# Altium PCB PCB3.PcbDoc
Units mm, origin at the board's own origin, x right, y up, seen from the top; angles counter-clockwise.
Board outline 65.4 x 65.4 mm, 2 copper layers (Top Layer, Bottom Layer); 56 components, 40 nets, 206 pads, 128 vias.
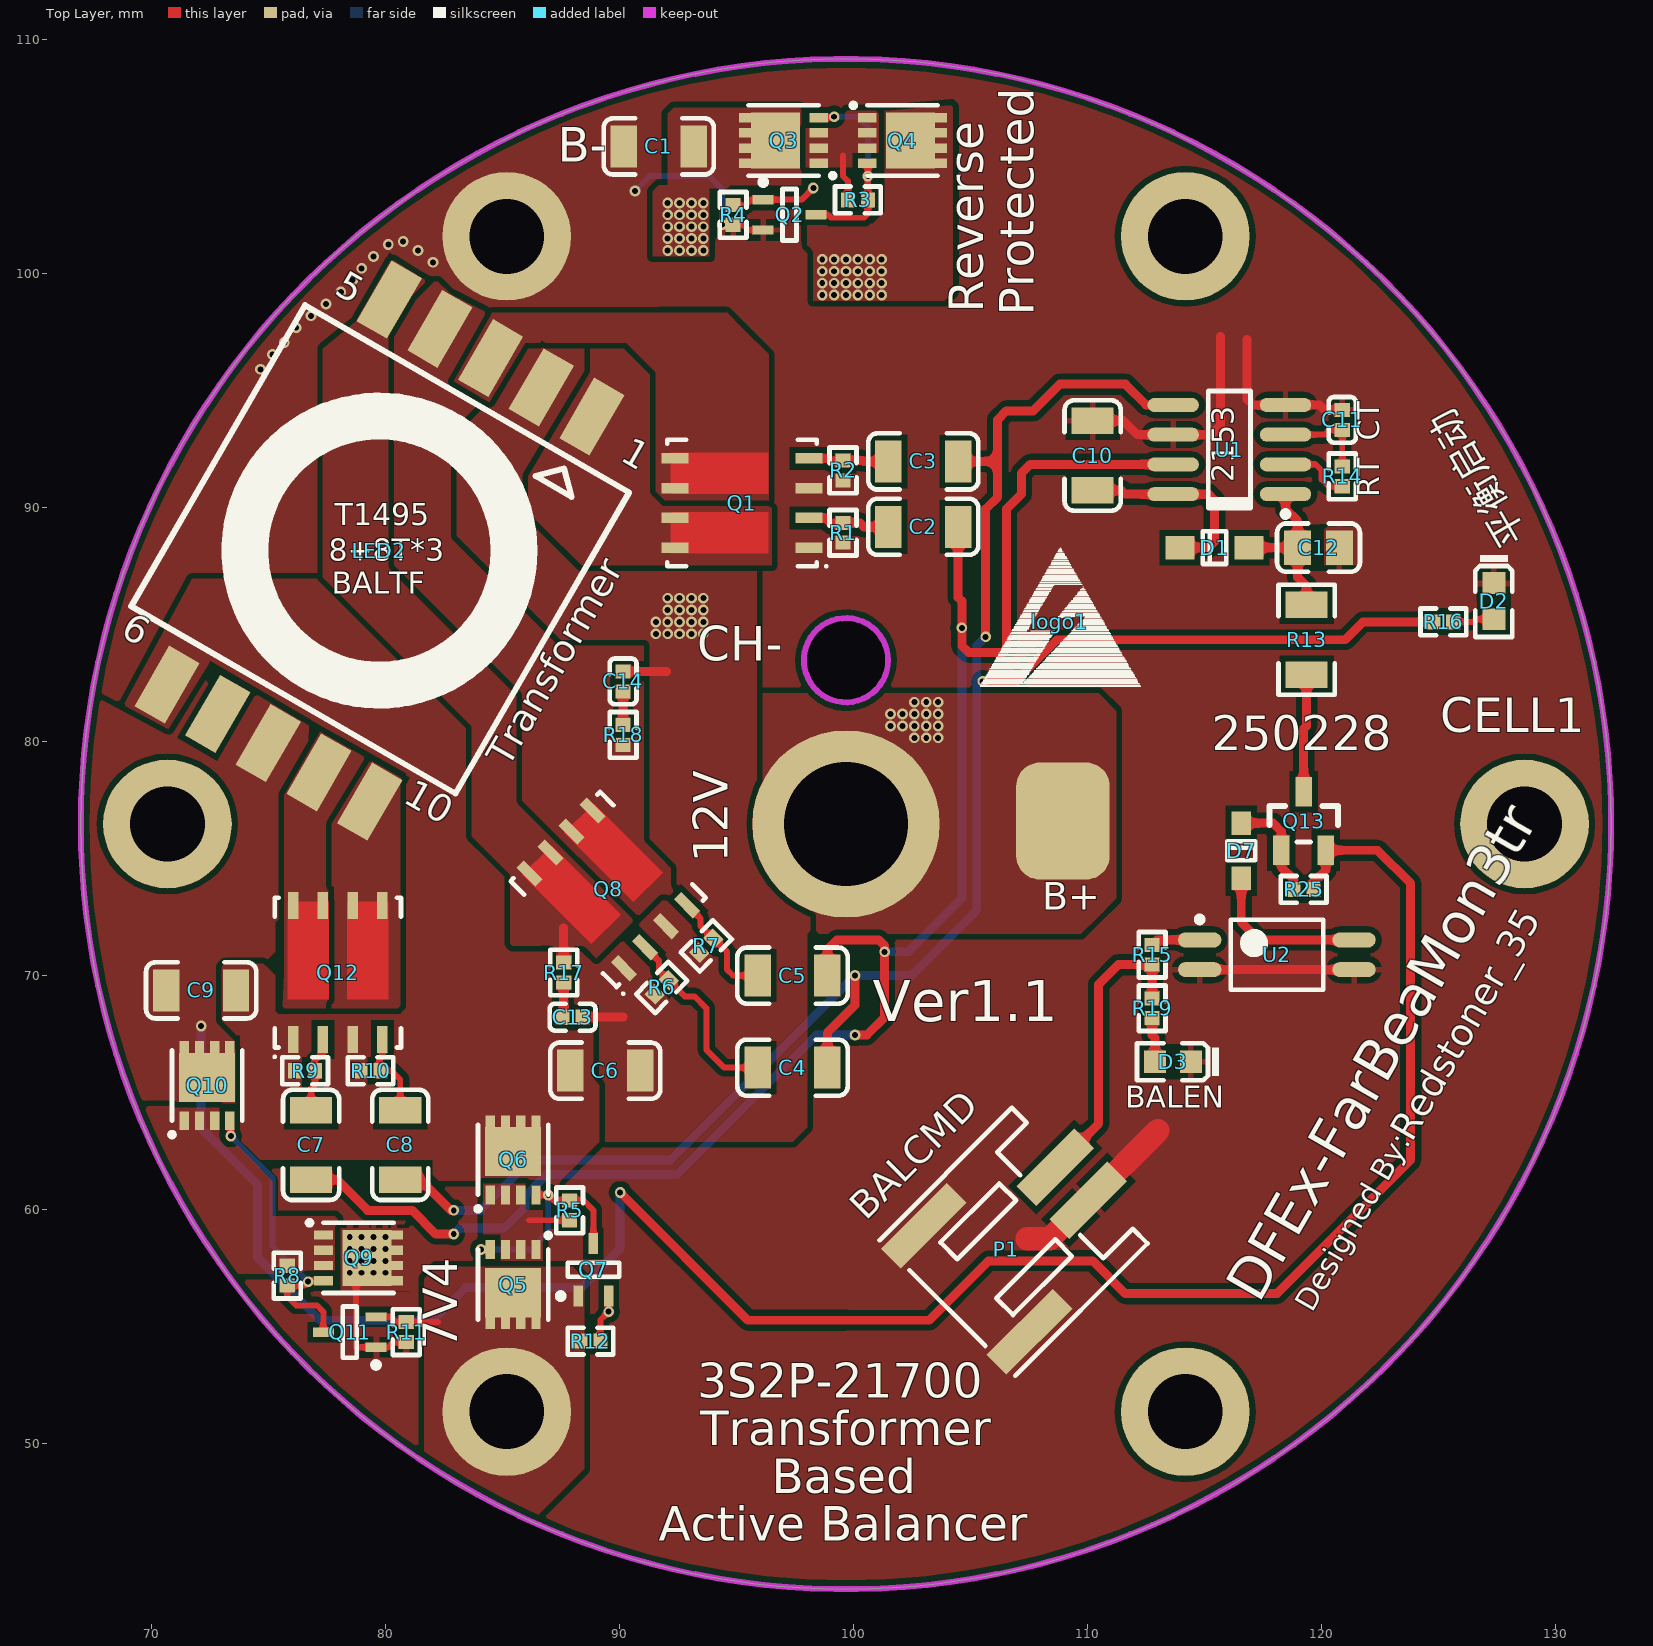
[diagram p0: Top Layer view]
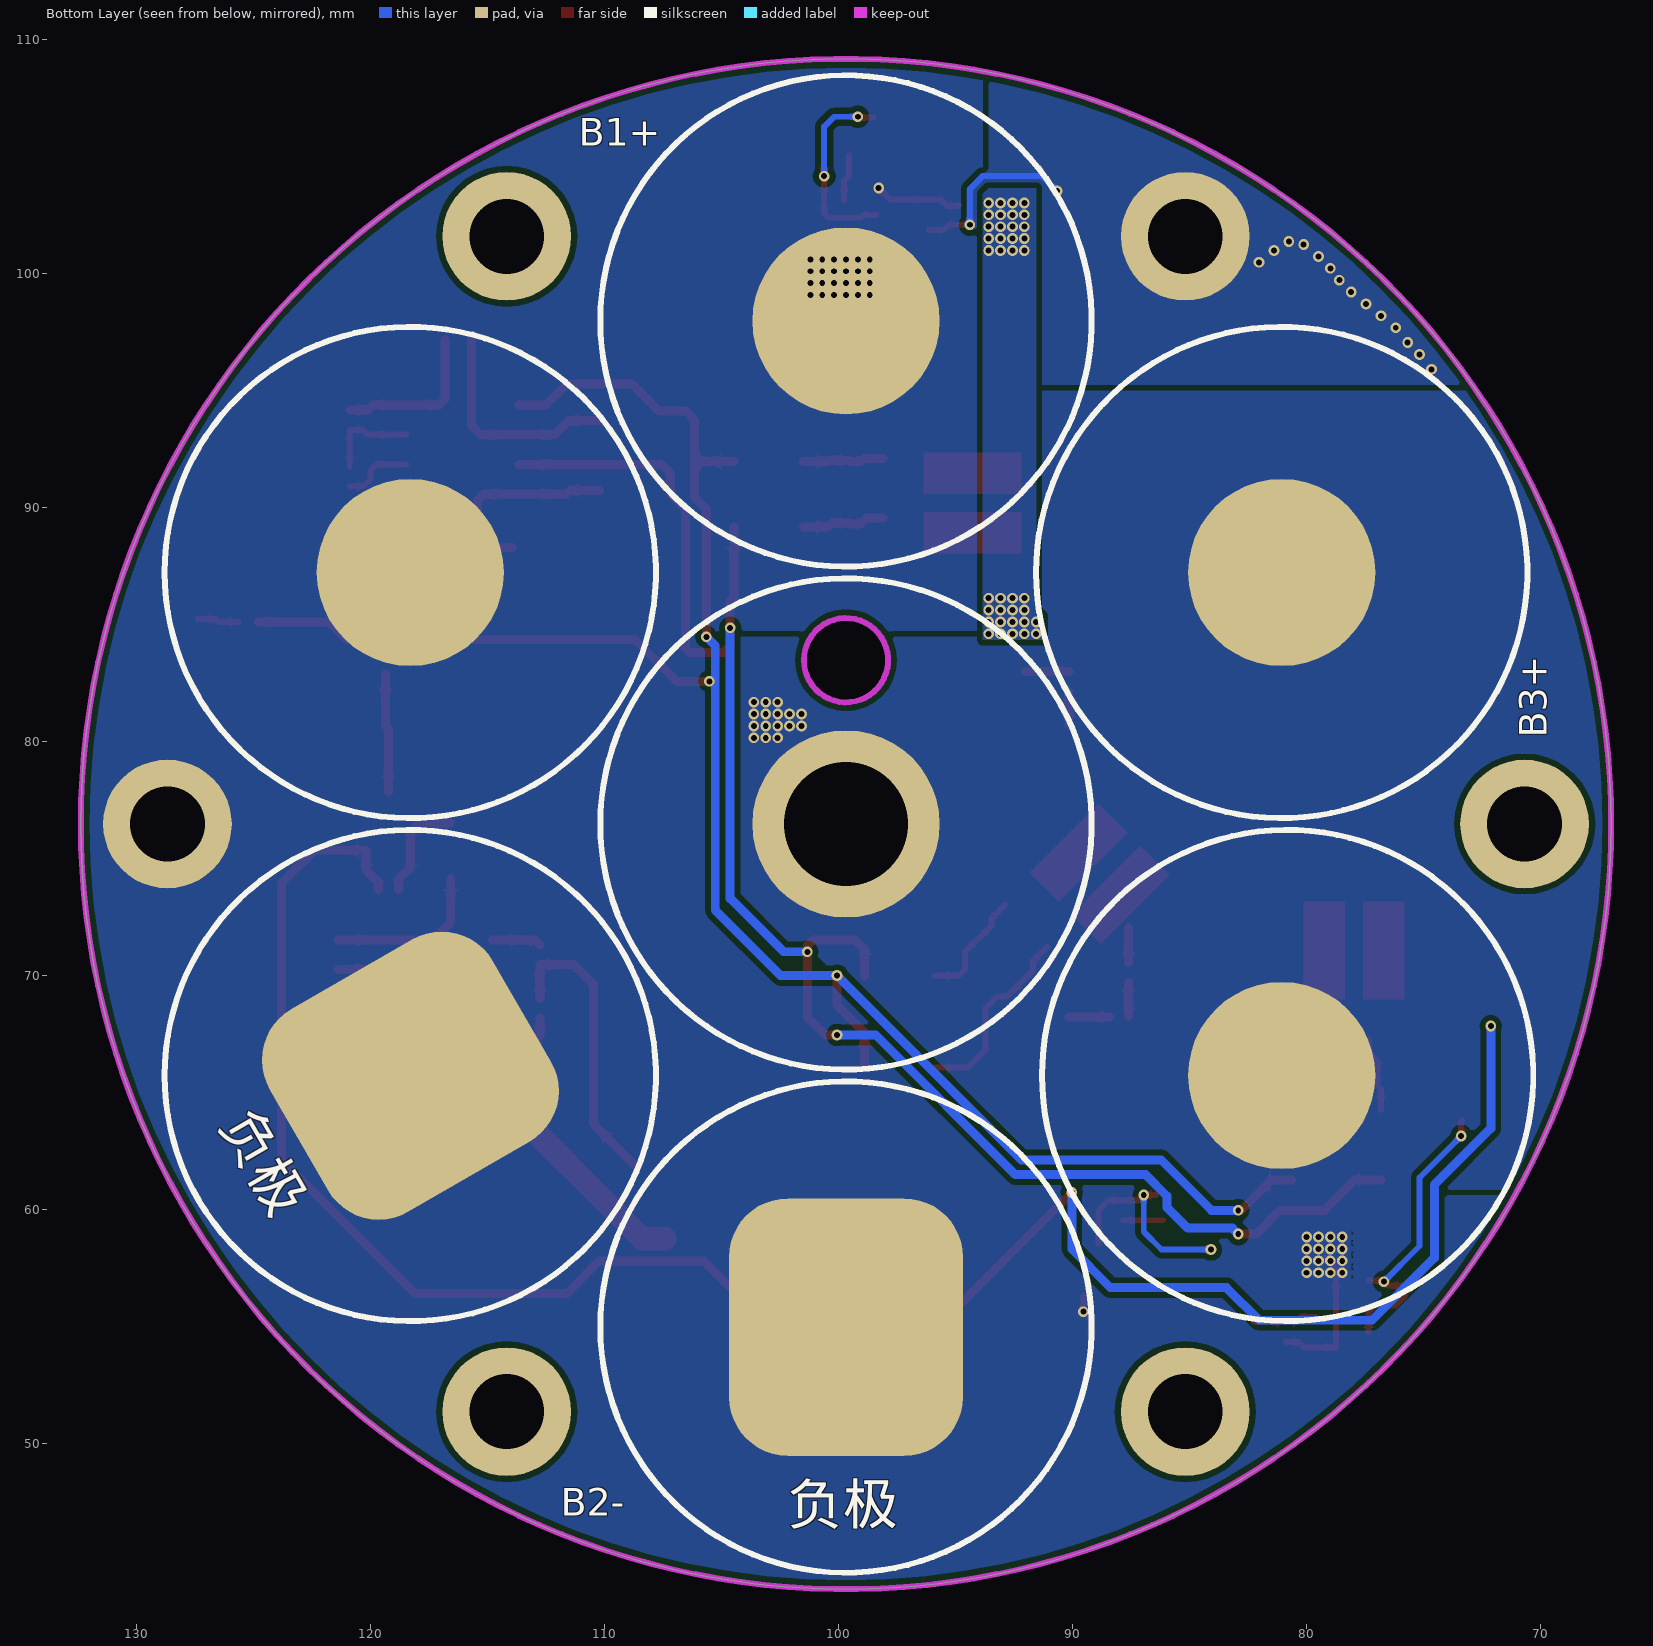
[diagram p1: Bottom Layer view, seen from below]
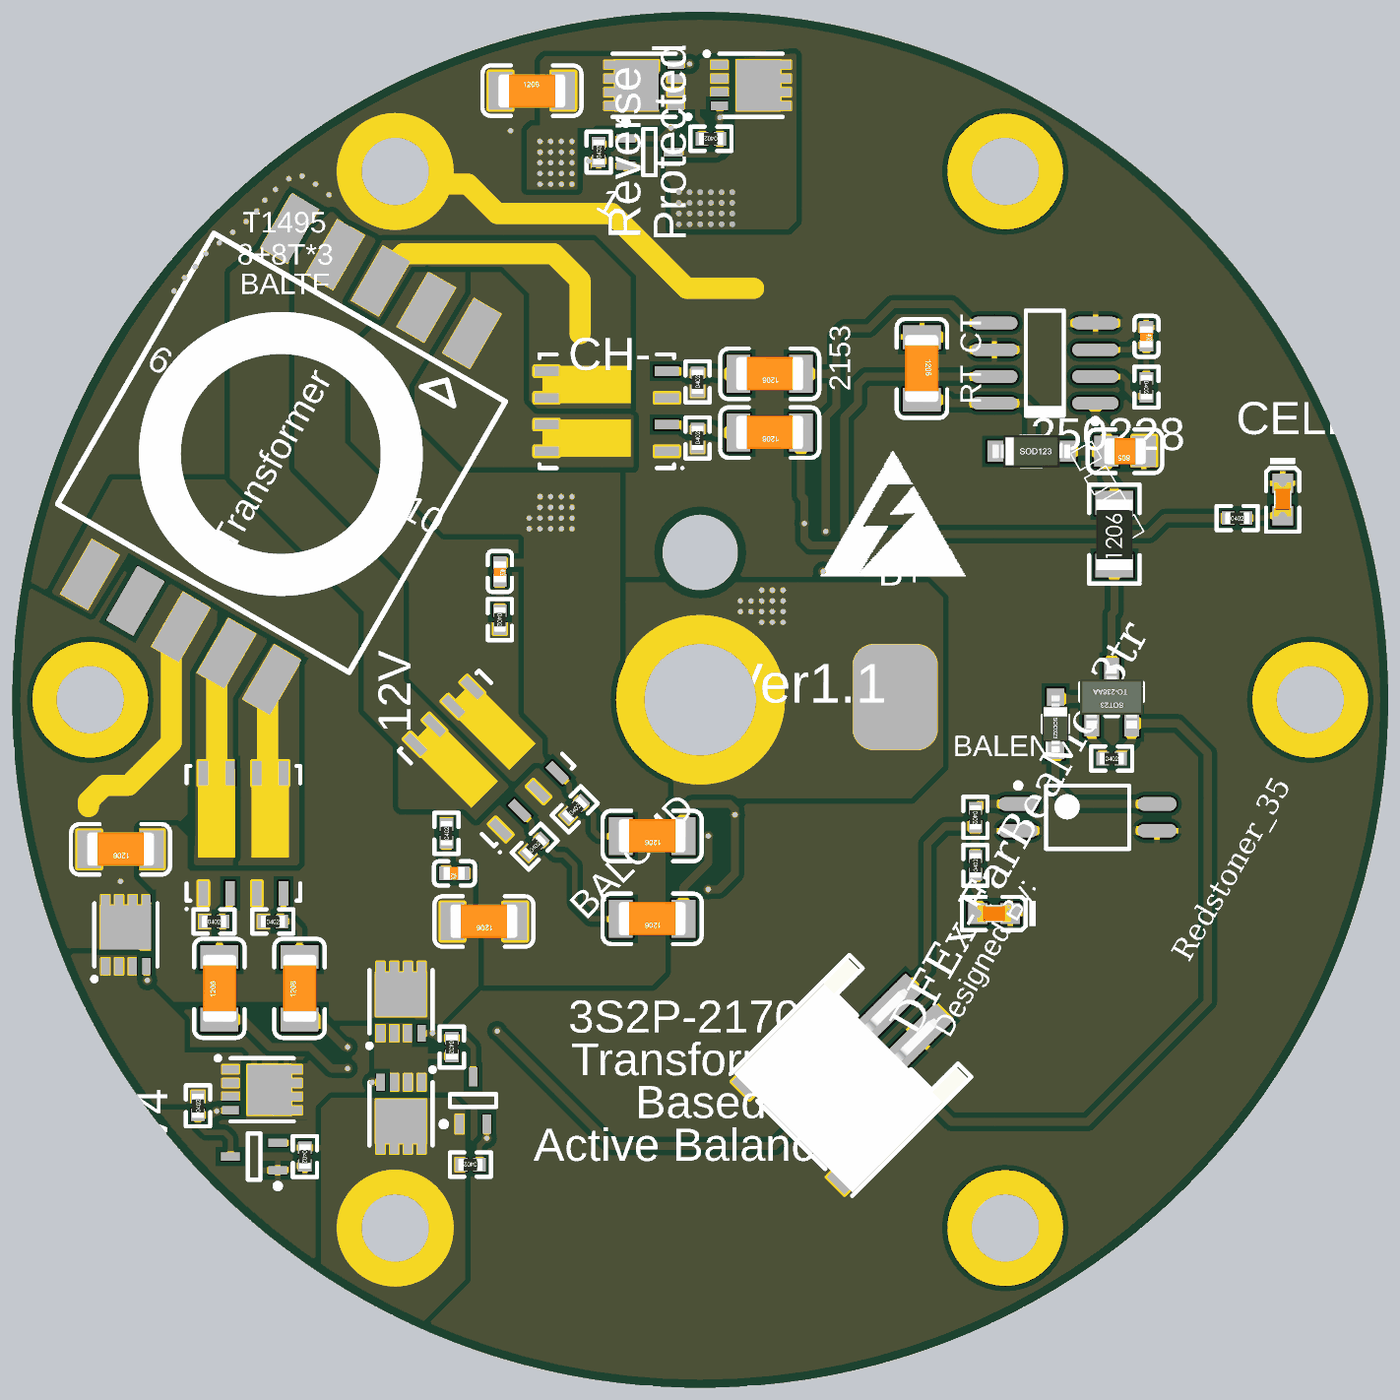
[diagram p2: 3D render of the assembled board from above, using the file's embedded part models]

## Layer stack, top to bottom
Top Solder: solder mask 0.0102, Solder Resist, Dk 3.5
Top Layer: signal copper 0.0356
Dielectric 1: dielectric 0.32, FR-4, Dk 4.8
Bottom Layer: signal copper 0.0356
Bottom Solder: solder mask 0.0102, Solder Resist, Dk 3.5

## Board outline
66.995,76.454 cw(c99.695,76.454) 99.695,109.154 cw(c99.695,76.454) 132.395,76.454 cw(c99.695,76.454) 99.695,43.754 cw(c99.695,76.454)
cut-out: 97.895,83.454 ccw(c99.695,83.454) 99.695,81.654 ccw(c99.695,83.454) 101.495,83.454 ccw(c99.695,83.454) 99.695,85.254 ccw(c99.695,83.454)

## Design rules (kind name [scope] priority, off if disabled: settings)
Clearance [All] p1: gap=0.25
PolygonConnect [All] p1: connectstyle=Direct reliefconductorwidth=0.254 reliefentries=4 polygonreliefangle="90 Angle" airgapwidth=0.254
RoomDefinition main [InComponentClass('main')] p1: confinementstyle=ConfineIn formatcopy=TRUE lockcomponents=FALSE outline 133.604,45.339 180.213,45.339 180.213,54.483 133.604,54.483
RoutingVias [All] p1: holewidth=0.711 width=1.27 viastyle="Through Hole" minholewidth=0.711 minwidth=1.27 maxholewidth=0.711 maxwidth=1.27
SolderMaskExpansion [All] p1: expansion=0.102
Width [All] p1: maxlimit=50.8 minlimit=0.254 preferedwidth=0.254
30 further rules are at their usual default settings.

## Components (designator, comment, footprint, x,y, rotation, side; value= is the part's Value field where it differs from the comment)
C1 "47uF (476) 20% 16V" 1206_C 91.694,105.41 r0 top
C2 "100nF (104) 10% 50V" 1206_C 102.997,89.154 r180 top
C3 "100nF (104) 10% 50V" 1206_C 102.997,91.948 r180 top
C4 "100nF (104) 10% 50V" 1206_C 97.409,66.04 r180 top
C5 "100nF (104) 10% 50V" 1206_C 97.409,69.977 r180 top
C6 "47uF (476) 20% 16V" 1206_C 89.408,65.913 r180 top
C7 "100nF (104) 10% 50V" 1206_C 76.835,62.738 r90 top
C8 "100nF (104) 10% 50V" 1206_C 80.645,62.738 r90 top
C9 "47uF (476) 20% 16V" 1206_C 72.136,69.342 r180 top
C10 "10uF (106) 10% 50V" 1206_C 110.236,92.202 r270 top
C11 "1.2nF (122) 10% 50V" 0402_C 120.904,93.726 r270 top
C12 "22uF (226) 20% 25V" 0805_C 119.888,88.265 r180 top
C13 "2.2nF (222) 10% 50V" 0402_C 88.011,68.199 r180 top
C14 "2.2nF (222) 10% 50V" 0402_C 90.17,82.55 r270 top
D1 "B5819W  SL" SOD-123 115.443,88.265 r0 top
D2 "绿灯 0603" 0603_LED_S1 127.381,85.979 r270 top
D3 "蓝灯 0603" 0603_LED_S1 113.665,66.294 r180 top
D7 "BZT52C6V2S" SOD-323 116.586,75.311 r270 top
LED2 "NTC" T14*9*5 79.756,88.138 r330 top locked
logo1 "logo" HIGH-VOLTAGE-2 108.839,85.09 r0 top
P1 "BALCMD" PH2.0-WS-2P 105.283,57.023 r315 top
Q1 "AP60H04NF" "Dual SSO8" 95.25,90.17 r180 top
Q2 "2N7002KW" SC70-3 97.282,102.489 r0 top
Q3 "AP80P02DF" DFN-8_L3.0-W3.0-P0.65-BL 97.028,105.664 r90 top
Q4 "AP80P02DF" DFN-8_L3.0-W3.0-P0.65-BL 102.108,105.664 r270 top
Q5 "AP80P02DF" DFN-8_L3.0-W3.0-P0.65-BL 85.471,56.769 r180 top
Q6 "AP80P02DF" DFN-8_L3.0-W3.0-P0.65-BL 85.471,62.103 r0 top
Q7 "2N7002KW" SC70-3 88.9,57.404 r90 top
Q8 "AP60H04NF" "Dual SSO8" 89.535,73.66 r135 top
Q9 "AP80P02DF" DFN-8_L3.0-W3.0-P0.65-BL 78.867,57.912 r270 top
Q10 "AP80P02DF" DFN-8_L3.0-W3.0-P0.65-BL 72.39,65.278 r0 top
Q11 "2N7002KW" SC70-3 78.486,54.737 r180 top
Q12 "AP60H04NF" "Dual SSO8" 77.978,70.104 r90 top
Q13 "NCE60P04Y" SOT-23(SOT-23-3) 119.253,76.581 r270 top
R1 "10KΩ (1002) ±1%" 0402_R 99.568,88.9 r90 top
R2 "10KΩ (1002) ±1%" 0402_R 99.568,91.567 r90 top
R3 "470KΩ (4703) ±1%" 0402_R 100.203,103.124 r180 top
R4 "470KΩ (4703) ±1%" 0402_R 94.869,102.489 r90 top
R5 "470KΩ (4703) ±1%" 0402_R 87.884,59.944 r270 top
R6 "10KΩ (1002) ±1%" 0402_R 91.821,69.469 r45 top
R7 "10KΩ (1002) ±1%" 0402_R 93.726,71.247 r45 top
R8 "470KΩ (4703) ±1%" 0402_R 75.819,57.15 r90 top
R9 "10KΩ (1002) ±1%" 0402_R 76.581,65.913 r0 top
R10 "10KΩ (1002) ±1%" 0402_R 79.375,65.913 r0 top
R11 "470KΩ (4703) ±1%" 0402_R 80.899,54.737 r270 top
R12 "470KΩ (4703) ±1%" 0402_R 88.773,54.356 r180 top
R13 "100Ω (100) ±1%" 1206_R 119.38,84.328 r90 top
R14 "22KΩ (2202) ±1%" 0402_R 120.904,91.313 r270 top
R15 "10KΩ (1002) ±1%" 0402_R 112.776,70.866 r270 top
R16 "2KΩ (2001) ±1%" 0402_R 125.222,85.09 r0 top
R17 "2.2Ω (2R2) ±1%" 0402_R 87.63,70.104 r90 top
R18 "2.2Ω (2R2) ±1%" 0402_R 90.17,80.264 r270 top
R19 "10KΩ (1002) ±1%" 0402_R 112.776,68.58 r90 top
R25 "20KΩ (2002) ±1%" 0402_R 119.253,73.66 r0 top
U1 "IR2153STRPBF" SO8_N 116.078,92.456 r180 top
U2 "TLP291-GB" SOP127P700X210-4M 118.11,70.866 r0 top

## Footprints (in the part's own frame and the unit in brackets; to place one, negate y for a bottom-side part, rotate by r counter-clockwise, add the part's x,y. Pads: shape width x height; smd on the part's side, far side on the other; paste and mask are expansions set on the pad)
0402_C [mm]
  rect 0.6x0.65 smd mask+0.051: 1(-0.425,0) 2(0.425,0)
  silkscreen extent -0.97,-0.58 0.97,0.58, body extent -0.48,-0.3 0.52,0.3, height 0.2
0402_R [mm]
  rect 0.6x0.65 smd mask+0.051: 1(-0.425,0) 2(0.425,0)
  silkscreen extent -0.97,-0.58 0.97,0.58, body extent -0.57,-0.27 0.58,0.28, height 0.41
0603_LED_S1 [mm]
  rect 0.93x0.98 smd: A(0.77,0) K(-0.77,0)
  silkscreen extent -1.98,-0.79 1.54,0.79, body extent -0.8,-0.4 0.8,0.4, height 0.6
0805_C [mm]
  rect 1.16x1.47 smd: 1(-0.89,0) 2(0.89,0)
  silkscreen extent -1.77,-1.04 1.77,1.04, body extent -1,-0.62 1,0.63, height 0.77
1206_C [mm]
  rect 1.13x1.8 smd: 1(-1.49,0) 2(1.49,0)
  silkscreen extent -2.36,-1.2 2.35,1.2, body extent -1.6,-0.81 1.6,0.79, height 1
1206_R [mm]
  rect 1.13x1.8 smd: 1(-1.49,0) 2(1.49,0)
  silkscreen extent -2.36,-1.2 2.35,1.2, body extent -1.7,-0.86 1.65,0.87, height 0.85
DFN-8_L3.0-W3.0-P0.65-BL [mm]
  rect 0.4x0.8 smd paste-100 mask+0.051: 1(-0.975,-1.5) 2(-0.325,-1.5) 3(0.325,-1.5) 4(0.975,-1.5) 5(0.975,1.5) 6(0.325,1.5) 7(-0.325,1.5) 8(-0.975,1.5)
  rect 2.4x2.1 smd paste-100 mask+0.051: 8(0,0.35)
  silkscreen extent -1.6,-2.2 1.5,1.5, body extent -1.52,-1.52 1.52,1.52, height 1.2
"Dual SSO8" [mm] "英飞凌双SSO8封装"
  rect 1.15x0.45 smd: 1(-2.86,1.905) 2(-2.86,0.635) 3(-2.86,-0.635) 4(-2.86,-1.905) 5(2.86,-1.905) 6(2.86,-0.635) 7(2.86,0.635) 8(2.86,1.905)
  Top Layer region: -1.143,-2.159 3.048,-2.159 3.048,-0.381 -1.143,-0.381
  Top Layer region: -1.143,0.381 3.048,0.381 3.048,2.159 -1.143,2.159
  silkscreen extent -3.65,-2.7 3.2,2.75, body extent -3.05,-2.55 3.05,2.55, height 1.05
HIGH-VOLTAGE-2 [mm]
  silkscreen extent -3.4,-2.75 3.46,3.17
PH2.0-WS-2P [mm] "长：8mm，宽：7.6mm，高：5.5mm"
  rect 1.2x4 smd: 0(-3.2,-0.006) 0(3.2,-0.006)
  rect 1.2x3.5 smd: 1(-1,5.744) 2(1,5.744)
  silkscreen extent -4.1,-1.78 4.1,6.22, body extent -4,-1.65 4,6.95, height 5.55
SC70-3 [mm] "3 Lead SC70(SOT-323) package for small Transistor"
  rect 0.9x0.4 smd mask+0.05: 1(-1.125,0.65) 2(-1.125,-0.65) 3(1.125,0)
  silkscreen extent -1.25,-1.1 0.3,1.52, body extent -0.67,-1.1 0.67,1.1, height 1.1
SO8_N [mm] "SOIC, 8-Leads, Body 4.9x3.9mm, Pitch 1.27mm, IPC Medium Density"
  oval 2.2x0.6 smd: 1(-2.4,1.905) 2(-2.4,0.635) 3(-2.4,-0.635) 4(-2.4,-1.905) 5(2.4,-1.905) 6(2.4,-0.635) 7(2.4,0.635) 8(2.4,1.905)
  silkscreen extent -2.53,-2.5 0.9,2.88, body extent -2,-2.5 2,2.5, height 1.75
SOD-123 [mm]
  rect 1.25x1 smd: 1(1.475,0) 2(-1.475,0)
  silkscreen extent -0.5,-0.7 0.5,0.7, body extent -1.85,-0.77 1.85,0.78, height 1.35
SOD-323 [mm]
  rect 1x0.83 smd: 1(1.18,0) 2(-1.18,0)
  silkscreen extent -0.4,-0.6 0.4,0.6, body extent -1.35,-0.62 1.35,0.63, height 1.1
SOP127P700X210-4M [mm] "SOP, 4-Leads, Body 2.70x4.40mm, Pitch 1.27mm, IPC Low Density"
  oval 1.85x0.65 smd: 1(-3.3,0.635) 2(-3.3,-0.635) 3(3.3,-0.635) 4(3.3,0.635)
  silkscreen extent -3.42,-1.5 1.97,1.63, body extent -2.2,-1.5 2.2,1.5, height 2.1
SOT-23(SOT-23-3) [mm]
  rect 1.25x0.7 smd: 1(1.25,-0.95) 2(1.25,0.95) 3(-1.25,0)
  silkscreen extent -0.65,-1.46 0.9,1.46, body extent -1.5,-1.5 1.5,1.5, height 1.3
T14*9*5 [mm] "均衡变压器，T14*9*5"
  rect 1.5x3 smd mask+0.03: 1(5,9.5) 2(2.5,9.5) 3(0,9.5) 4(-2.5,9.5) 5(-5,9.5) 6(-5,-9.5) 7(-2.5,-9.5) 8(0,-9.5) 9(2.5,-9.5) 10(5,-9.5)
  silkscreen extent -8,-7.36 8,7.49

## Part data
C1 C6 C9: library part "1206 220pF (221) 10% 50V", "贴片电容"
C2 C3 C4 C5 C7 C8: library part "1206 100nF (104) 10% 50V", "贴片电容"
C10: library part "1206 10uF (106) 10% 50V", "贴片电容"
C11: library part "0402 1nF (102) 10% 50V", "贴片电容"
C12: library part "0805 22uF (226) 20% 25V", "贴片电容"
C13 C14: library part "0402 2.2nF (222) 10% 50V", "贴片电容"
D1: library part "SOD-123 B5819W  SL", "肖特基二极管"
D2: library part "0603 绿灯", "发光二极管"
D3: library part "0603 蓝灯", "发光二极管"
D7: library part "SOD-323 1N4148WS T4", "SOD-323稳压二极管 6.2V稳压电压"
P1: library part "CON 2", "2-Pin"
Q1 Q8 Q12: "APM双N沟道MOS管，DFN56封装，40V/60A 4.8mΩ/4.5V Vgs"
Q2 Q7 Q11: library part "2N7002 7002", "单N沟道MOSFET(场效应管)"
Q3 Q4 Q5 Q6 Q9 Q10: library part "SON/DFN5x6 MOS", "PDFN3x3 20V 50A 5.8mΩ N-Ch MOSFET"
Q13: library part SI2301CDS-T1-GE3, "MOS(场效应管)"
R1 R2 R6 R7 R9 R10 R15 R19: library part "0402 10KΩ (1002) 1%", "贴片电阻"
R3 R4 R5 R8 R11 R12: library part "0402 470KΩ (4703) 1%", "贴片电阻"
R13: library part "1206 4.7KΩ (4701) 1%", "贴片电阻"
R14: library part "0402 39KΩ (3902) 1%", "贴片电阻"
R16: library part "0402 2KΩ (2001) 1%", "贴片电阻"
R17 R18: library part "0402 1Ω (1R00) 1%", "贴片电阻"
R25: library part "0402 20KΩ (2002) 1%", "贴片电阻"
U1: library part EG2153, "600V耐压，自震荡具备死区时间的2A峰值驱动能力半桥驱动芯片"
U2: library part Optoisolator1, "4-Pin Phototransistor Optocoupler"

## Free pads (board coordinates)
  rrect50% 10x11 smd far side mask+0.03: 2(99.695,54.954)
  rrect50% 10x11 smd far side rot 60 mask+0.03: 3(118.315,65.704)
  round 8 smd far side mask+0.03: 4(99.695,97.954) 5(118.315,87.204) 6(81.075,87.204) 7(81.075,65.704)
  round 5.5 hole 3.2 mask+0.03: 8(70.695,76.454) 8(85.195,101.569) 8(114.195,101.569) 8(114.195,51.339) 9(128.695,76.454) 10(85.195,51.339)
  round 8 hole 5.3 mask+0.03: 11(99.695,76.454)
  rrect50% 4x5 smd mask+0.03: 12(108.966,76.581)

## Via types
v1: diameter 0.457, hole 0.254, Top Layer to Bottom Layer, tented both sides, 128 vias

## Nets (pads, with @x,y where several pads share a name; then routed paths per layer and width w, separated by ;. In a path a pad name is that pad's centre, name@x,y a point inside that pad or via, vN(x,y) a via of type N, cw(c..) or ccw(c..) an arc to the next point about the centre after c; other vN are vias at no path point)
3V7: pad.2 pad.3 pad.4 pad.5 pad.9 Q2.1 Q4.5 Q4.6 Q4.7 Q4.8 Q7.2 R4.2 R12.1 | length 5.8
  Top Layer w0.254: R12.1 89.198,55.259 v1(89.55,55.611) Q7.2 ; R4.2 94.913,102.87 95.377,102.87 95.646,103.139 Q2.1 97.805,103.139 v1(98.298,103.632)
  other v1: 98.679,99.06 99.187,99.06 99.695,99.06 100.203,99.06 100.711,99.06 101.219,99.06 98.679,99.568 99.187,99.568 99.695,99.568 100.203,99.568 100.711,99.568 101.219,99.568 98.679,100.076 99.187,100.076 99.695,100.076 100.203,100.076 100.711,100.076 101.219,100.076 98.679,100.584 99.187,100.584 99.695,100.584 100.203,100.584 100.711,100.584 101.219,100.584
7V4: pad.10 Q5.5 Q5.6 Q5.7 Q5.8 Q7.1 Q11.2 R11.1 R12.2 | length 2.7
  Top Layer w0.254: Q11.2 80.249,55.387 80.474,55.162 R11.1 82.252,55.162
12V: pad.6 pad.7 pad.11 pad.12 Q9.5 Q9.6 Q9.7 Q9.8 Q11.1 R11.2 | length 6.3
  Top Layer w0.254: Q9.8@79.217,57.912 78.755,57.45 78.755,54.087 Q11.1 80.122,54.087 80.347,54.312 R11.2
  other v1: 78.486,57.277 78.994,57.277 79.502,57.277 80.01,57.277 78.486,57.785 78.994,57.785 79.502,57.785 80.01,57.785 78.486,58.293 78.994,58.293 79.502,58.293 80.01,58.293 78.486,58.801 78.994,58.801 79.502,58.801 80.01,58.801 102.616,80.137 103.124,80.137 103.632,80.137 101.6,80.645 102.108,80.645 102.616,80.645 103.124,80.645 103.632,80.645 101.6,81.153 102.108,81.153 102.616,81.153 103.124,81.153 103.632,81.153 102.616,81.661 103.124,81.661 103.632,81.661
BALEN: P1.1 R15.2 R19.2 | length 12.6
  Top Layer w0.381: P1.1 110.49,63.644 110.49,69.596 111.335,70.441 R15.2 R19.2
CELL1: C1.2 C6.1 C13.1 C14.1 LED2.2 Q3.5 Q3.6 Q3.7 Q3.8 Q8.1 Q8.3 R6.1 R7.1 | length 3.6
  Top Layer w0.381: C13.1 90.17,68.199 ; C14.1 92.031,82.975
  other v1: 91.567,84.582 92.075,84.582 92.583,84.582 93.091,84.582 93.599,84.582 91.567,85.09 92.075,85.09 92.583,85.09 93.091,85.09 93.599,85.09 92.075,85.598 92.583,85.598 93.091,85.598 93.599,85.598 92.075,86.106 92.583,86.106 93.091,86.106 93.599,86.106 92.075,100.965 92.583,100.965 93.091,100.965 93.599,100.965 92.075,101.473 92.583,101.473 93.091,101.473 93.599,101.473 92.075,101.981 92.583,101.981 93.091,101.981 93.599,101.981 92.075,102.489 92.583,102.489 93.091,102.489 93.599,102.489 92.075,102.997 92.583,102.997 93.091,102.997 93.599,102.997
CELL2: C6.2 C9.1 LED2.6 Q6.5 Q6.6 Q6.7 Q6.8 Q12.1 Q12.3 R9.1 R10.1
CELL3: C9.2 LED2.8 Q10.5 Q10.6 Q10.7 Q10.8 Q13.2 R25.2 | length 89.1
  Top Layer w0.381: v1(90.043,60.706) 95.504,55.245 103.251,55.245 105.791,57.785 110.236,57.785 111.633,56.388 118.11,56.388 123.825,62.103 123.825,73.914 122.408,75.331 Q13.2 120.203,74.483 119.678,73.958 R25.2
  Bottom Layer w0.381: v1(72.136,67.818) 72.136,63.443 74.549,61.03 74.549,57.912 77.216,55.245 82.042,55.245 83.439,56.642 88.392,56.642 90.043,58.293 v1(90.043,60.706)
CORE1: LED2.1 Q1.7 Q1.8
CORE3: LED2.3 Q1.5 Q1.6
CORE4: LED2.4 Q8.5 Q8.6 R18.2
CORE5: LED2.5 Q8.7 Q8.8 R17.2 | length 1.5
  Top Layer w0.381: R17.2 87.63,72.009
CORE9: LED2.9 Q12.7 Q12.8
CORE10: LED2.10 Q12.5 Q12.6
GH1: C2.2 Q1.2 R1.2 | length 3.6
  Top Layer w0.381: Q1.2 98.806,89.535 99.06,89.281 99.524,89.281 R1.2 100.286,89.325 100.457,89.154 C2.2
GH2: C5.2 Q8.4 R7.2 | length 4.9
  Top Layer w0.254: Q8.4 93.472,72.417 93.472,72.102 R7.2 94.06,71.548 94.615,70.993 94.615,70.231 94.869,69.977 C5.2
GH3: C7.2 Q12.2 R9.2 | length 3.3
  Top Layer w0.254: C7.2 76.835,65.151 77.006,65.322 R9.2 76.962,65.957 76.962,66.294 77.343,66.675 Q12.2
GL1: C3.2 Q1.4 R2.2 | length 3.5
  Top Layer w0.381: Q1.4 98.933,92.075 99.06,91.948 99.524,91.948 R2.2 100.413,91.992 100.457,91.948 C3.2
GL2: C4.2 Q8.2 R6.2 | length 8.2
  Top Layer w0.254: Q8.2 91.117,71.189 91.694,70.612 91.694,70.197 R6.2 92.803,69.088 93.218,69.088 93.726,68.58 93.726,66.802 94.488,66.04 C4.2
GL3: C8.2 Q12.4 R10.2 | length 3.7
  Top Layer w0.254: Q12.4 79.883,66.548 79.756,66.421 79.756,65.957 R10.2 80.264,65.913 80.645,65.532 C8.2
GND: C1.1 C10.1 C11.1 C12.1 D2.K D3.K P1.0 P1.2 pad.8@85.195,101.569 Q1.1 Q1.3 Q2.2 R1.1 R2.1 R4.1 U1.4 U1.6 U2.2 U2.3 | length 38.2
  Top Layer w0.254: v1(94.405,102.064) R4.1 95.294,102.064 95.519,101.839 Q2.2
  Top Layer w0.381: C10.1 111.54,93.692 112.141,93.091 U1.6 115.316,93.091 115.697,93.472 115.697,97.282 ; U2.2 U2.3 ; 116.84,97.155 116.84,94.615 117.094,94.361 U1.4 119.932,94.361 120.142,94.151 C11.1
  Top Layer w1: 107.442,58.726 108.4,58.726 P1.2 113.03,63.356
  Bottom Layer w0.254: v1(90.678,103.505) 91.313,104.14 93.853,104.14 94.405,103.588 v1(94.405,102.064)
  other v1: 74.676,95.885 75.184,96.52 75.692,97.028 76.2,97.663 76.835,98.171 77.47,98.679 78.105,99.187 78.613,99.695 78.994,100.203 82.042,100.457 79.502,100.711 81.407,100.965 80.137,101.219 80.772,101.346
HDRV: C2.1 C5.1 C7.1 U1.7 | length 73.9
  Top Layer w0.381: C7.1 77.944,61.248 79.248,59.944 81.153,59.944 82.169,58.928 v1(82.931,58.928) ; C5.1 98.899,71.086 99.314,71.501 101.092,71.501 101.346,71.247 v1(101.346,70.993) 101.346,68.199 100.584,67.437 v1(100.076,67.437) ; C2.1 104.487,86.14 104.648,85.979 v1(104.648,84.836) 104.648,84.074 104.936,83.786 106.392,83.786 106.553,83.947 106.553,89.913 107.188,90.548 107.188,91.44 107.569,91.821 U1.7
  Bottom Layer w0.381: v1(82.931,58.928) 83.185,59.182 85.09,59.182 85.979,60.071 85.979,60.557 86.894,61.472 92.463,61.472 98.428,67.437 v1(100.076,67.437) ; v1(101.346,70.993) 102.362,70.993 104.648,73.279 v1(104.648,84.836)
LDRV: C3.1 C4.1 C8.1 R16.1 U1.5 | length 87
  Top Layer w0.381: C8.1 81.5,61.248 82.804,59.944 v1(82.931,59.944) ; C4.1 98.899,67.53 100.076,68.707 v1(100.076,69.977) ; C3.1 106.172,91.948 ; v1(105.537,82.55) 106.934,82.55 108.712,84.328 121.031,84.328 121.793,85.09 R16.1 ; v1(105.664,84.455) 105.664,89.916 106.172,90.424 106.172,93.726 106.553,94.107 107.696,94.107 108.839,95.25 111.633,95.25 112.522,94.361 U1.5
  Bottom Layer w0.381: v1(82.931,59.944) 84.074,59.944 86.233,62.103 92.202,62.103 v1(100.076,69.977) 102.489,69.977 105.283,72.771 105.283,82.55 ; v1(105.537,82.55) 105.283,82.55 ; v1(105.664,84.455) 105.283,84.074 105.283,82.55
NetC10_2: C10.2 D1.2 U1.8 | length 8.5
  Top Layer w0.381: C10.2 111.472,90.712 ; 111.633,90.551 U1.8 115.189,90.551 115.443,90.297 115.443,88.519 115.189,88.265 D1.2
NetC11_2: C11.2 R14.1 U1.3 | length 4.1
  Top Layer w0.254: U1.3 120.142,93.091 120.352,93.301 C11.2 R14.1
NetC13_2: C13.2 R17.1 | length 1.4
  Top Layer w0.381: C13.2@87.63,68.243 R17.1
NetC14_2: C14.2 R18.1 | length 1.4
  Top Layer w0.381: R18.1 C14.2
NetD2_A: D2.A R16.2 | length 1.8
  Top Layer w0.254: R16.2 126.508,85.09 126.627,85.209 D2.A
NetD3_A: D3.A R19.1 | length 1.9
  Top Layer w0.381: R19.1 112.776,67.437 112.895,67.318 D3.A
NetD7_1: D7.1 U2.4 | length 7
  Top Layer w0.381: D7.1 116.586,72.263 117.348,71.501 U2.4
NetD7_2: D7.2 Q13.1 R25.1 | length 4.6
  Top Layer w0.381: D7.2 117.946,76.491 118.303,76.134 Q13.1 118.303,74.61 118.828,74.085 R25.1
NetQ2_3: Q2.3 Q3.4 Q4.4 R3.1 | length 8.9
  Top Layer w0.254: Q2.3 98.933,102.489 99.06,102.362 100.457,102.362 100.628,102.533 R3.1 v1(100.628,104.14) Q4.4@100.628,104.669 ; Q3.4 99.146,106.639 v1(99.187,106.68)
  Bottom Layer w0.254: v1(99.187,106.68) 100.203,106.68 100.628,106.255 v1(100.628,104.14)
NetQ3_1: Q3.1 Q3.2 Q3.3 Q4.1 Q4.2 Q4.3 R3.2 | length 2
  Top Layer w0.254: 99.568,105.029 99.568,104.14 99.778,103.93 R3.2
NetQ5_1: Q5.1 Q5.2 Q5.3 Q6.1 Q6.2 Q6.3 R5.2 | length 1.7
  Top Layer w0.254: 86.15,59.519 R5.2
NetQ5_4: Q5.4 Q6.4 Q7.3 R5.1 | length 9.3
  Top Layer w0.254: v1(84.098,58.269) Q5.4 ; Q6.4 v1(86.971,60.603) 87.205,60.369 R5.1 88.475,60.369 88.9,59.944 Q7.3
  Bottom Layer w0.254: v1(84.098,58.269) 86.209,58.269 86.971,59.031 v1(86.971,60.603)
NetQ9_1: Q9.1 Q9.2 Q9.3 Q10.1 Q10.2 Q10.3 R8.2
NetQ9_4: Q9.4 Q10.4 Q11.3 R8.1 | length 13
  Top Layer w0.254: Q10.4 73.406,63.737 v1(73.406,63.119) ; Q11.3 77.361,55.608 77.089,55.88 76.2,55.88 75.819,56.261 R8.1 76.537,56.725 v1(76.708,56.896) 76.749,56.937 Q9.4
  Bottom Layer w0.254: v1(73.406,63.119) 75.184,61.341 75.184,58.42 v1(76.708,56.896)
NetQ13_3: Q13.3 R13.1 | length 5.1
  Top Layer w0.381: Q13.3 119.253,80.518 119.38,80.645 R13.1
NetR14_2: R14.2 U1.2 | length 3
  Top Layer w0.254: U1.2 119.761,91.821 120.015,91.567 120.015,91.186 120.313,90.888 R14.2
NetR15_1: R15.1 U2.1 | length 2.1
  Top Layer w0.381: R15.1 112.986,71.501 U2.1
VDRV: C12.2 D1.1 R13.2 U1.1 | length 7.2
  Top Layer w0.381: D1.1 C12.2 ; U1.1 118.478,89.929 118.998,89.409 C12.2 ; R13.2 119.38,86.614 118.998,86.996 C12.2
pads on no net: LED2.7

## Polygon pours and split planes (outlines as drawn)
GND on Top Layer "Component Side-No Net 1" (solid, remove dead copper, pour order 93): 60.96,82.042 66.167,82.042 67.818,80.391 72.771,85.344 77.978,85.344 77.978,94.869 82.55,99.441 82.296,99.695 82.296,104.648 73.66,104.648 72.644,103.632 69.85,100.838 57.785,100.838
GND on Top Layer "Component Side-No Net 1" (solid, remove dead copper, pour order 91): 60.833,117.094 64.77,113.157 135.255,113.157 135.255,48.895 129.54,43.18 62.611,43.18
CELL1 on Top Layer "Component Side-No Net 1" (solid, remove dead copper, pour order 89): 89.154,68.733 87.918,68.733 87.821,68.83 87.63,69.021 87.63,72.009 89.281,72.009 89.662,71.628 90.678,70.612 90.678,68.961 90.424,68.707
CELL2 on Top Layer "Component Side-No Net 1" (solid, remove dead copper, pour order 87): 87.122,67.818 87.122,72.39 82.804,72.39 82.677,72.263 82.677,66.421 82.677,65.532 82.804,65.405 83.947,64.262 88.519,64.262
CELL2 on Top Layer "Component Side-No Net 1" (solid, remove dead copper, pour order 85): 83.795,68.421 89.186,68.421 90.678,66.929 91.059,66.548 91.059,60.96 83.312,60.96 82.296,61.976
CORE4 on Top Layer "Component Side-No Net 1" (solid, remove dead copper, pour order 83): 80.391,100.33 84.963,100.33 91.44,93.853 92.657,92.636 92.657,73.904 92.657,73.099 92.202,72.644 89.535,71.755 86.995,74.295 84.963,76.073 78.359,87.63 78.994,88.265 78.994,98.552
GND on Top Layer "Component Side-No Net 1" (solid, remove dead copper, pour order 79): 99.949,62.357 104.013,62.357 110.617,55.753 109.728,54.864 109.728,50.165 100.203,50.165 99.568,50.8
12V on Top Layer "Component Side-No Net 1" (solid, remove dead copper, pour order 75): 95.631,82.042 110.236,82.042 110.49,82.042 111.252,81.28 111.252,76.962 111.252,73.279 110.363,72.39 109.728,71.755 96.012,71.755 94.546,71.755 93.983,72.318 93.218,73.083 93.218,82.296
CELL1 on Top Layer "Component Side-No Net 1" (solid, remove dead copper, pour order 73): 95.885,78.232 95.885,88.646 90.805,88.773 90.297,76.2 91.44,73.406 95.631,73.152
GND on Top Layer "Component Side-No Net 1" (solid, remove dead copper, pour order 71): 68.834,101.727 78.232,100.076 77.724,86.233 66.548,87.884
GND on Top Layer "Component Side-No Net 1" (solid, remove dead copper, pour order 69): 72.517,107.696 87.249,108.712 89.027,97.028 67.437,96.774
CELL3 on Top Layer "Component Side-No Net 1" (solid, remove dead copper, pour order 67): 64.389,72.517 76.327,72.263 76.835,82.55 60.833,82.931
CORE9 on Top Layer "Component Side-No Net 1" (solid, remove dead copper, pour order 63): 77.216,80.391 75.692,77.724 75.692,75.565 75.692,70.104 75.565,67.691 79.121,67.437 81.534,81.026
CORE10 on Top Layer "Component Side-No Net 1" (solid, remove dead copper, pour order 61): 79.502,79.375 77.724,76.454 77.724,70.485 77.724,68.199 81.661,68.199 81.915,68.453 81.915,78.867
CELL2 on Top Layer "Component Side-No Net 1" (solid, remove dead copper, pour order 59): 68.834,81.534 70.739,80.518 72.39,83.185 72.517,83.439 76.835,80.899 80.899,78.613 80.899,77.089 80.899,67.31 85.979,67.183 86.233,78.486 77.153,86.931 71.755,86.931
CORE5 on Top Layer "Component Side-No Net 1" (solid, remove dead copper, pour order 57): 80.264,100.584 81.915,99.568 82.296,99.441 80.645,97.79 80.645,96.012 80.645,88.265 85.344,83.566 86.487,82.423 86.487,78.105 86.487,76.962 90.879,72.57 89.408,71.099 89.408,70.485 85.979,70.485 85.344,71.12 85.344,74.295 84.455,75.184 83.693,75.946 83.693,77.343 83.693,80.645 82.677,81.661 77.343,86.995 77.343,91.186 77.343,97.155 77.343,96.774 78.74,97.917
CELL1 on Top Layer "Component Side-No Net 1" (solid, remove dead copper, pour order 51): 85.725,97.028 85.979,97.282 87.122,97.282 88.138,97.282 88.9,96.52 88.71,96.33 88.71,95.652 88.71,94.044 86.233,91.567 86.106,91.44 86.106,90.678 86.106,89.939 88.392,87.653 88.392,87.503 93.853,87.503 93.98,87.376 93.853,87.249 93.853,84.328 87.503,84.328 83.058,88.773 83.058,91.948 83.058,93.091 84.455,94.488
CORE1 on Top Layer "Component Side-No Net 1" (solid, remove dead copper, pour order 49): 88.773,95.758 88.773,97.853 89.852,97.853 91.567,97.853 91.44,90.932 91.44,90.805 91.948,90.297 96.774,90.304 96.774,87.503 96.012,87.503 88.392,87.503 86.741,89.154 86.106,89.789 86.106,91.313
GND on Top Layer "Component Side-No Net 1" (solid, remove dead copper, pour order 45): 96.901,87.503 103.886,87.503 103.886,98.933 103.632,99.187 101.473,101.346 93.472,101.346 92.837,101.346 91.694,102.489 91.567,102.616 91.567,109.347 84.836,109.347 83.82,108.331 81.788,106.299 81.788,102.362 81.788,100.457 82.931,99.314 84.963,98.298 85.09,98.298 92.583,98.298 92.71,98.171 92.836,98.297 94.616,98.297 96.393,96.52 96.774,96.139 96.774,87.503
CORE3 on Top Layer "Component Side-No Net 1" (solid, remove dead copper, pour order 43): 82.931,95.377 84.455,94.488 85.979,97.028 88.138,97.028 90.297,97.028 91.567,95.758 91.567,94.742 91.567,92.456 91.567,90.678 91.821,90.424 91.948,90.297 96.266,90.297 96.393,90.297 96.393,93.218 96.393,96.52 95.25,97.663 94.615,98.298 91.694,98.298 84.582,98.298
12V on Top Layer "Component Side-No Net 1" (solid, remove dead copper, pour order 96): 74.295,62.23 74.803,61.722 84.201,61.722 84.201,46.482 83.82,46.101 81.661,48.26 68.199,48.26
GND on Top Layer "Component Side-No Net 1" (solid, remove dead copper, pour order 80): 122.174,96.266 122.174,89.789 121.666,89.281 121.539,89.154 120.65,89.154 120.269,89.154 120.142,89.027 120.142,87.503 125.349,87.503 132.588,87.503 132.588,99.187 131.572,100.203 130.429,101.346 123.825,101.346
CELL3 on Top Layer "Component Side-No Net 1" (solid, remove dead copper, pour order 72): 68.961,64.516 73.66,64.516 73.66,67.183 72.898,67.945 73.025,68.072 73.025,70.739 74.549,70.739 74.803,70.485 75.311,70.993 75.311,73.66 75.311,73.787 75.184,73.914 75.057,74.041 72.136,74.041 65.659,74.041 65.151,73.533 65.913,72.771 65.913,64.008
CELL2 on Top Layer "Component Side-No Net 1" (solid, remove dead copper, pour order 70): 87.757,61.468 87.503,61.214 84.582,61.214 82.423,61.214 82.296,61.214 82.042,61.468 82.042,62.992 87.63,62.992
CELL2 on Top Layer "Component Side-No Net 1" (solid, remove dead copper, pour order 68): 84.582,63.373 85.344,62.103 74.422,62.103 74.295,62.103 73.634,62.764 73.66,62.79 73.66,66.04 73.66,67.437 73.152,67.945 73.025,68.072 73.025,68.834 73.025,70.358 73.152,70.485 74.549,70.485 74.803,70.485 75.057,70.231 75.311,69.977 75.311,68.58 75.311,68.453 75.565,68.199 75.311,67.945 75.311,63.119
NetQ9_1 on Top Layer "Component Side-No Net 1" (solid, remove dead copper, pour order 66): 77.978,57.277 77.928,57.227 73.231,57.227 70.916,57.227 69.977,58.166 68.199,59.944 68.199,63.373 67.564,64.008 67.945,64.389 72.136,64.389 73.025,64.389 73.152,64.262 73.365,64.049 73.365,63.16 73.365,63.033 75.057,61.341 75.184,61.214 75.184,59.69 77.851,59.69 77.978,59.563
12V on Top Layer "Component Side-No Net 1" (solid, remove dead copper, pour order 64): 78.105,59.182 81.28,59.182 81.28,56.515 78.105,56.515
CELL2 on Top Layer "Component Side-No Net 1" (solid, remove dead copper, pour order 60): 81.407,69.342 81.407,69.088 80.899,68.58 80.645,68.326 78.867,68.326 74.549,68.326 74.422,68.199 74.295,68.072 74.295,67.31 74.295,62.865 74.549,62.611 74.803,62.357 84.709,62.357 85.725,62.357 86.775,63.407 86.775,70.358 81.407,70.358
CELL1 on Top Layer "Component Side-No Net 1" (solid, pour order 56): 98.044,71.755 98.171,71.882 98.171,76.2 98.171,77.343 97.028,78.486 96.901,78.359 92.837,78.359 92.837,74.676 95.758,71.755
CELL2 on Top Layer "Component Side-No Net 1" (solid, remove dead copper, pour order 50): 84.291,70.993 81.661,70.993 81.534,70.866 81.407,70.739 81.407,70.358 81.407,69.088 81.788,68.707 82.677,68.707 83.566,68.707 84.455,67.818 84.582,67.691 86.775,67.691 86.775,70.959 86.741,70.993
CELL1 on Top Layer "Component Side-No Net 1" (solid, remove dead copper, pour order 46): 91.313,86.868 93.853,86.868 93.853,78.359 94.615,77.597 95.123,77.089 95.123,75.184 95.123,74.676 97.028,72.771 98.044,71.755 98.044,71.12 98.044,63.5 97.79,63.246 97.409,62.865 97.028,62.865 91.948,62.865 89.154,62.865 89.154,65.659 89.154,69.342 89.154,70.485 89.916,71.247 92.456,73.787 92.456,74.168 92.456,74.676 91.948,75.184 91.313,75.819
NetQ5_1 on Top Layer "Component Side-No Net 1" (solid, remove dead copper, pour order 40): 84.201,61.087 86.106,61.087 86.106,60.198 86.741,60.198 86.741,57.785 84.836,57.785 84.836,58.801 84.201,58.801
7V4 on Top Layer "Component Side-No Net 1" (solid, remove dead copper, pour order 38): 82.677,57.531 87.757,57.531 88.011,57.531 88.392,57.15 88.519,57.023 88.519,50.673 88.519,48.895 85.725,46.101 85.471,46.355 81.661,46.355 81.661,57.023 82.169,57.531
3V7 on Top Layer "Component Side-No Net 1" (solid, remove dead copper, pour order 36): 101.346,106.934 101.346,102.616 100.838,102.108 98.044,102.108 98.044,98.806 103.378,98.806 103.886,98.806 104.14,99.06 104.267,99.187 104.267,107.188
CELL1 on Top Layer "Component Side-No Net 1" (solid, remove dead copper, pour order 26): 93.853,100.711 91.44,100.711 91.44,103.505 91.694,103.759 92.964,103.759 93.726,103.759 93.853,103.632
CELL1 on Top Layer "Component Side-No Net 1" (solid, remove dead copper, pour order 8): 97.917,107.061 97.79,106.934 97.79,103.759 94.996,103.759 94.742,103.759 94.615,103.632 93.853,103.632 93.853,100.711 92.075,100.711 92.075,106.807 92.329,107.061
NetQ3_1 on Top Layer "Component Side-No Net 1" (solid, remove dead copper, pour order 4): 97.917,106.299 99.187,106.299 99.187,106.426 99.695,106.934 100.965,106.934 101.092,106.807 101.092,105.283 101.092,105.156 100.965,105.029 100.076,105.029 100.076,104.521 97.917,104.521
3V7 on Bottom Layer "Component Side-No Net 1" (solid, remove dead copper, pour order 81): 98.044,97.663 98.933,96.774 108.585,96.774 108.585,91.948 108.331,91.694 107.696,92.329 97.282,92.329
12V on Bottom Layer "Component Side-No Net 1" (solid, remove dead copper, pour order 94): 73.152,64.516 73.152,51.689 73.787,51.054 75.057,52.324 94.996,52.324 94.996,69.723 94.488,70.231
GND on Bottom Layer "Component Side-No Net 1" (solid, remove dead copper, pour order 88): 62.738,91.313 63.754,92.329 102.108,92.329 102.108,109.601 98.806,112.903 94.996,109.093 60.198,109.093
3V7 on Bottom Layer "Component Side-No Net 1" (solid, remove dead copper, pour order 86): 93.853,108.712 93.853,82.169 89.789,82.169 69.215,61.595 70.104,60.706 70.104,41.656 123.063,41.656 123.825,40.894 128.016,45.085 136.271,45.085 136.271,112.141 135.001,113.411
12V on Bottom Layer "Component Side-No Net 1" (solid, remove dead copper, pour order 84): 89.662,83.82 90.297,84.455 104.267,84.455 104.267,78.359 104.521,78.105 101.473,75.057 101.473,72.009 91.44,72.009 90.678,72.771
12V on Bottom Layer "Component Side-No Net 1" (solid, remove dead copper, pour order 82): 72.746,94.976 91.587,94.976 93.218,93.345 93.853,92.71 93.853,85.852 93.853,84.328 97.282,80.899 100.584,80.899 103.759,80.899 104.648,80.01 104.648,73.279 102.362,70.993 101.346,70.993 101.092,70.993 100.076,69.977 90.932,60.833 65.278,60.833 65.278,92.837 63.119,94.996
12V on Bottom Layer "Component Side-No Net 1" (solid, remove dead copper, pour order 62): 78.105,56.769 78.105,60.325 78.105,61.849 76.962,62.992 76.835,63.119 76.835,67.564 76.835,68.834 77.597,69.596 78.232,70.231 82.423,70.231 84.074,70.231 84.963,69.342 85.852,68.453 85.852,65.786 85.852,62.992 85.09,62.23 83.693,60.833 81.788,60.833 81.153,60.833 80.645,60.325 80.518,60.198 80.518,56.769
CELL1 on Bottom Layer "Component Side-No Net 1" (solid, remove dead copper, pour order 24): 92.075,103.632 93.599,103.632 93.853,103.378 93.853,99.949 93.853,85.598 93.853,84.328 91.44,84.328 91.313,84.328 91.313,85.344 91.567,85.598 91.567,103.632

## Keep-outs
Keep-Out Layer:
  circle w0.254: c99.695,76.454 r32.7
  circle w0.254: c99.695,83.454 r1.8

## Silkscreen, mask and mechanical layers (free items; w line width, h text height)
Top Overlay:
  circle w2: c79.756,88.138 r5.75
  rectangle: 115.178,89.956 116.978,90.424
  text "B-" at 87.376,104.267 h2.5
  text "5" at 77.597,98.806 h2 r330
  text "Reverse" at 106.045,98.298 h2.5 r90
  text "Protected" at 108.204,98.171 h2.5 r90
  text "CT" at 122.809,92.837 h1.6 r90
  text "1" at 89.789,91.694 h2 r330
  text "2153" at 116.586,91.059 h1.6 r90
  text "RT" at 122.809,90.424 h1.6 r90
  text "T1495" at 77.851,88.9 h1.6
  text "平衡启动" at 129.159,88.9 h2.03 r120
  text "8+8T*3" at 77.597,87.376 h1.6
  text "BALTF" at 77.724,85.979 h1.6
  text "6" at 68.453,84.201 h2 r330
  text "CH-" at 93.345,82.931 h2.5
  text "CELL1" at 125.095,79.883 h2.5
  text "250228" at 115.316,79.121 h2.5
  text "Transformer" at 85.598,78.613 h2 r60
  text "10" at 80.518,77.089 h2 r330
  text "12V" at 95.123,74.803 h2.5 r90
  text "B+" at 108.077,72.39 h2.03
  text "Ver1.1" at 100.838,67.437 h3
  text "BALEN" at 111.633,64.008 h1.6
  text "Redstoner_35" at 124.206,62.611 h2 r60
  text "BALCMD" at 100.838,59.182 h2.03 r45
  text "DFEx-FarBeaMon3tr" at 117.856,55.626 h3 r60
  text "Designed By:" at 119.888,55.372 h1.6 r60
  text "7V4" at 83.566,53.975 h2.5 r90
  text "3S2P-21700" at 93.345,51.435 h2.5
  text "Transformer" at 93.472,49.403 h2.5
  text "Based" at 96.52,47.371 h2.5
  text "Active Balancer" at 91.694,45.339 h2.5
Bottom Overlay:
  circle w0.254: c118.315,65.704 r10.5
  circle w0.254: c118.315,87.204 r10.5
  circle w0.254: c99.695,97.954 r10.5
  circle w0.254: c81.075,87.204 r10.5
  circle w0.254: c80.821,65.704 r10.5
  circle w0.254: c99.695,54.954 r10.5
  circle w0.254: c99.695,76.454 r10.5
  text "B1+" at 111.125,105.029 h2.03
  text "B3+" at 69.342,80.137 h2.03 r270
  text "负极" at 127,63.373 h3 r60
  text "B2-" at 111.887,46.482 h2.03
  text "负极" at 102.235,45.974 h3
Top Solder:
  lines w1: 70.612,71.374 70.612,71.628 71.374,72.39 72.517,72.39 74.549,74.422 74.549,78.74 ; 76.708,71.374 76.708,77.978 ; 79.121,70.993 79.121,76.962 ; 85.09,97.282 85.217,97.282 85.598,97.663 92.71,97.663 93.98,96.393 93.98,93.853 ; 85.979,100.965 88.646,100.965 90.043,99.568 95.504,99.568 99.06,96.012 102.235,96.012
Mechanical 3:
  lines w0.254: 74.422,67.183 74.422,67.437 ; 103.378,107.188 103.886,107.188 ; 69.524,85.878 77.224,98.929 78.617,98.324 80.01,100.711 80.137,100.965 82.677,99.568 84.618,98.49 88.265,98.552 89.281,99.568 89.281,103.886 89.408,104.013 103.378,104.013 103.886,103.505 103.886,98.171 106.172,95.885 121.158,95.885 122.809,94.234 122.809,67.31 107.315,51.816 107.315,49.276 107.061,49.022 91.059,49.022 89.662,50.419 89.662,52.197 88.519,53.34 87.757,53.34 86.614,54.483 83.312,54.483 81.788,56.007 78.359,56.007 74.422,59.944 74.422,77.216 72.39,79.248 71.882,79.248 71.501,79.629 70.866,79.629 69.596,80.899 69.596,85.598 69.524,85.878
Mechanical 8:
  circle w0.254: c128.695,76.454 r3.1
  circle w0.254: c85.195,51.339 r3.1
  circle w0.254: c85.195,101.569 r3.1
Mechanical 11:
  lines w0.254: 75.692,58.293 81.788,58.293 81.788,53.34 78.105,53.34 77.851,53.594 77.851,54.102 77.724,54.229 76.962,54.229 76.708,54.483 76.708,55.88 76.454,56.134 75.438,56.134 75.184,56.388 75.184,58.293 76.327,58.293 ; 70.739,63.246 70.739,67.31 74.803,67.31 74.803,63.246 70.739,63.246 ; 94.742,100.457 103.886,100.457 103.886,107.188 94.742,107.188 94.742,104.394 94.742,100.457 ; 123.952,84.074 131.318,84.074 131.318,87.757 123.952,87.757 123.952,84.074
Mechanical 20:
  lines w0.254: 69.723,67.945 69.723,70.612 75.057,70.612 75.057,67.945 74.549,67.945 69.723,67.945 ; 89.281,102.997 94.107,102.997 94.107,106.553 89.281,106.553 89.281,102.997